# Altium PCB 256ch Adaptor PCB_TY.PcbDoc (part 1 of 2)
Units mm, origin at the board's own origin, x right, y up, seen from the top; angles counter-clockwise.
Board outline 152.4 x 101.6 mm, 4 copper layers (Top Layer, Signal Layer 1, Signal Layer 2, Bottom Layer), stack 0.778 mm thick; 1 components, 288 nets, 677 pads, 414 vias.
Unrouted connection lines stored in the file: 11.
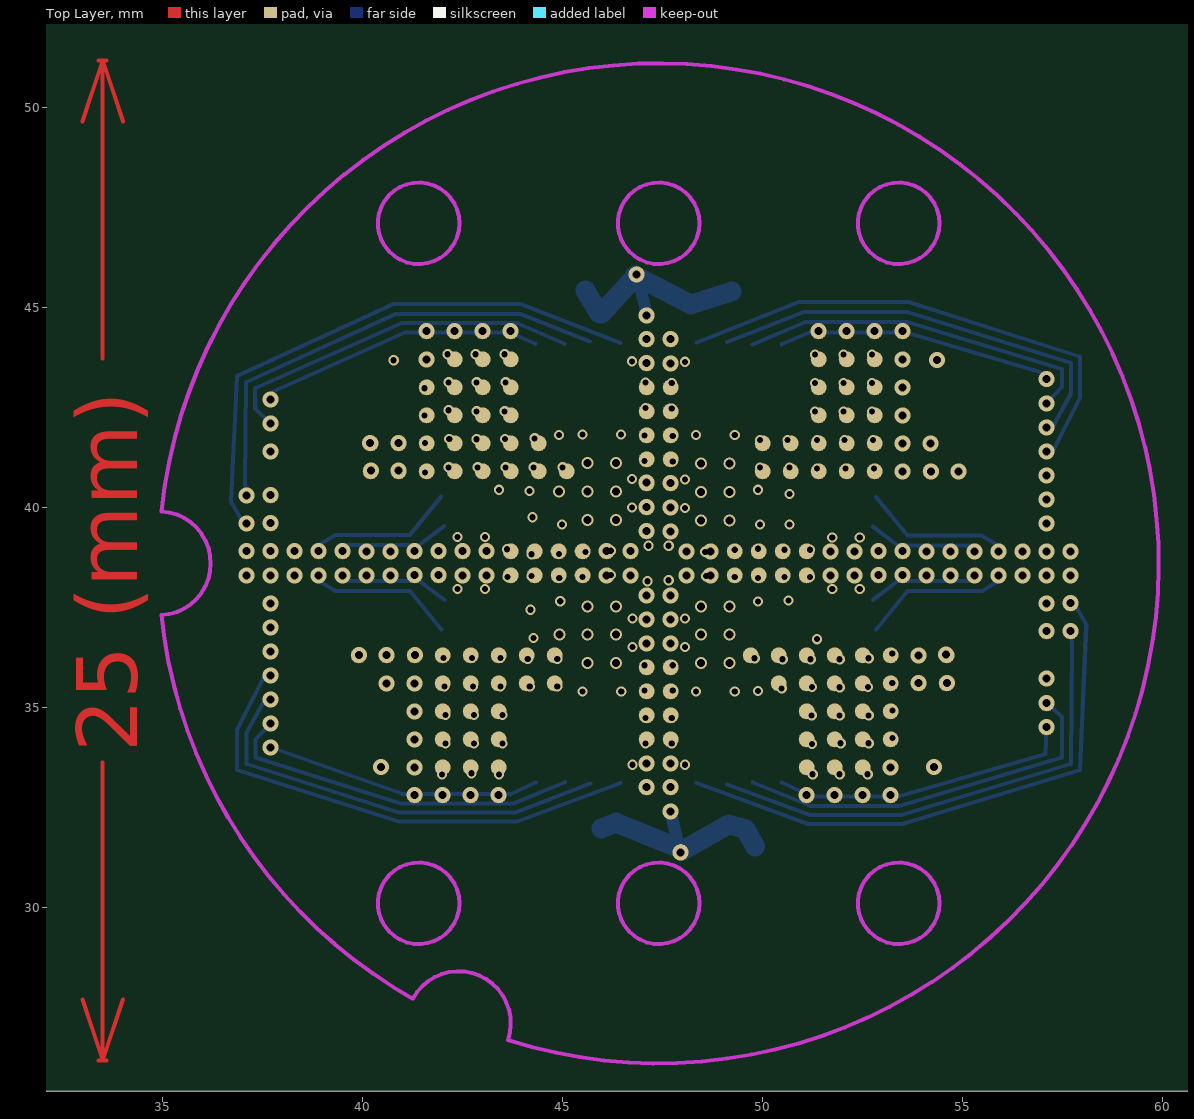
[diagram p0: Top Layer view]
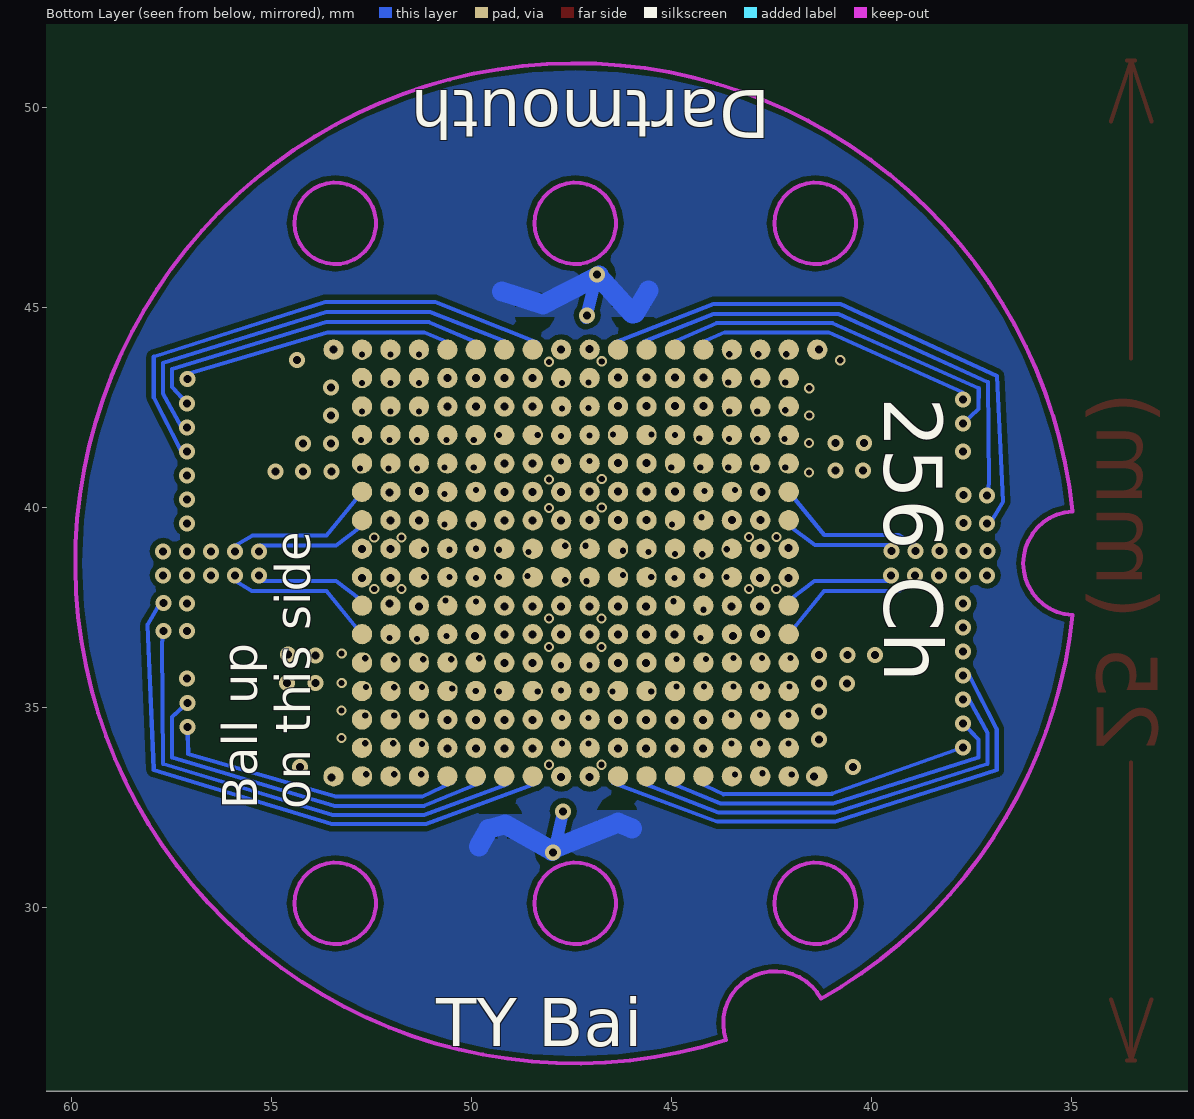
[diagram p1: Bottom Layer view, seen from below]
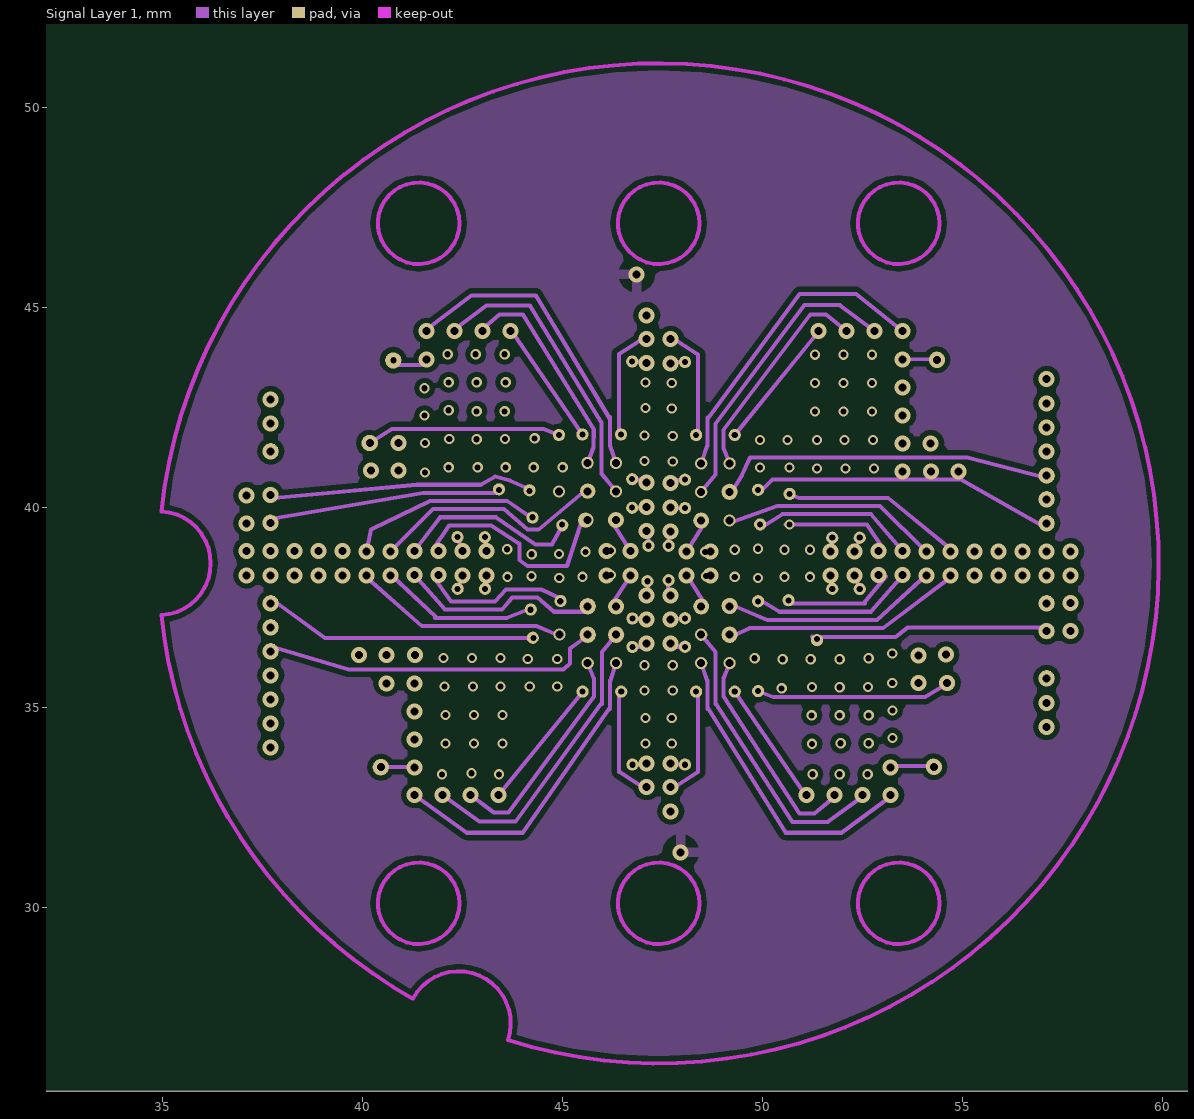
[diagram p2: Signal Layer 1]
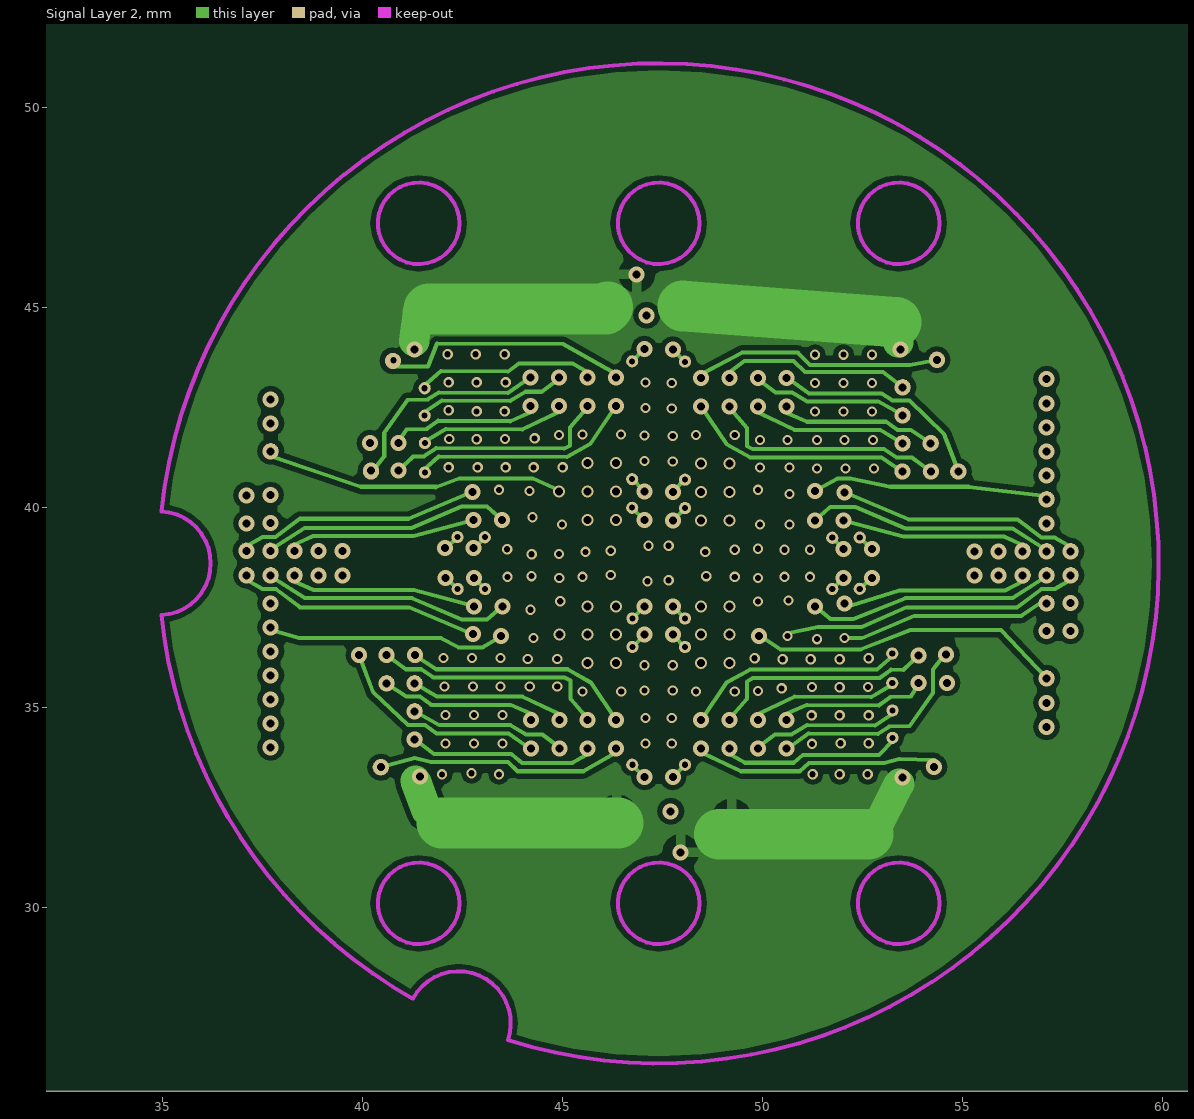
[diagram p3: Signal Layer 2]

## Layer stack, top to bottom
Top Solder: solder mask 0.0102, Solder Resist, Dk 3.5
Top Layer: signal copper 0.0356
Dielectric 1: core 0.254, FR-4, Dk 4.2
Signal Layer 1: signal copper 0.036
Dielectric 3: prepreg 0.127, Dk 4.2
Signal Layer 2: signal copper 0.036
Dielectric 5: core 0.254, Dk 4.2
Bottom Layer: signal copper 0.0356
Bottom Solder: solder mask 0.0102, Solder Resist, Dk 3.5

## Board outline
25.4,25.4 177.8,25.4 177.8,127 25.4,127

## Design rules (kind name [scope] priority, off if disabled: settings)
Clearance [All] p1: gap=0.127 ignorepadtopadclearanceinfootprint=FALSE
PolygonConnect [All] p1: connectstyle=Relief reliefconductorwidth=0.254 reliefentries=4 polygonreliefangle="90 Angle" airgapwidth=0.254
RoomDefinition Sheet1 [InComponentClass('Sheet1')] p1: confinementstyle=ConfineIn formatcopy=TRUE lockcomponents=FALSE outline 25.41,25.41 27.31,25.41 27.31,26.975 25.41,26.975
RoutingVias [All] p1: holewidth=0.711 width=1.27 viastyle="Through Hole" minholewidth=0.152 minwidth=0.254 maxholewidth=0.711 maxwidth=1.27
SolderMaskExpansion [All] p1: expansion=0.051 istentingtop=FALSE
Width [All] p1: maxlimit=0.254 minlimit=0.076 preferedwidth=0.254
30 further rules are at their usual default settings.

## Components (designator, comment, footprint, x,y, rotation, side; value= is the part's Value field where it differs from the comment)
? "Comment" Array16_16 52.73,43.942 r180 bottom

## Footprints (in the part's own frame and the unit in brackets; to place one, negate y for a bottom-side part, rotate by r counter-clockwise, add the part's x,y. Pads: shape width x height; smd on the part's side, far side on the other; paste and mask are expansions set on the pad)
Array16_16 [mil]
  round 20 smd: 0(0,0) 1(28,0) 2(56,0) 3(84,0) 4(112,0) 5(140,0) 6(168,0) 7(196,0) 8(224,0) 9(252,0) 10(280,0) 11(308,0) 12(336,0) 13(364,0) 14(392,0) 15(420,0) 16(0,-28) 17(28,-28) 18(56,-28) 19(84,-28) 20(112,-28) 21(140,-28) 22(168,-28) 23(196,-28) 24(224,-28) 25(252,-28) 26(280,-28) 27(308,-28) 28(336,-28) 29(364,-28) 30(392,-28) 31(420,-28) 32(0,-56) 33(28,-56) 34(56,-56) 35(84,-56) 36(112,-56) 37(140,-56) 38(168,-56) 39(196,-56) 40(224,-56) 41(252,-56) 42(280,-56) 43(308,-56) 44(336,-56) 45(364,-56) 46(392,-56) 47(420,-56) 48(0,-84) 49(28,-84) 50(56,-84) 51(84,-84) 52(112,-84) 53(140,-84) 54(168,-84) 55(196,-84) 56(224,-84) 57(252,-84) 58(280,-84) 59(308,-84) 60(336,-84) 61(364,-84) 62(392,-84) 63(420,-84) 64(0,-112) 65(28,-112) 66(56,-112) 67(84,-112) 68(112,-112) 69(140,-112) 70(168,-112) 71(196,-112) 72(224,-112) 73(252,-112) 74(280,-112) 75(308,-112) 76(336,-112) 77(364,-112) 78(392,-112) 79(420,-112) 80(0,-140) 81(28,-140) 82(56,-140) 83(84,-140) 84(112,-140) 85(140,-140) 86(168,-140) 87(196,-140) 88(224,-140) 89(252,-140) 90(280,-140) 91(308,-140) 92(336,-140) 93(364,-140) 94(392,-140) 95(420,-140) 96(0,-168) 97(28,-168) 98(56,-168) 99(84,-168) 100(112,-168) 101(140,-168) 102(168,-168) 103(196,-168) 104(224,-168) 105(252,-168) 106(280,-168) 107(308,-168) 108(336,-168) 109(364,-168) 110(392,-168) 111(420,-168) 112(0,-196) 113(28,-196) 114(56,-196) 115(84,-196) 116(112,-196) 117(140,-196) 118(168,-196) 119(196,-196) 120(224,-196) 121(252,-196) 122(280,-196) 123(308,-196) 124(336,-196) 125(364,-196) 126(392,-196) 127(420,-196) 128(0,-224) 129(28,-224) 130(56,-224) 131(84,-224) 132(112,-224) 133(140,-224) 134(168,-224) 135(196,-224) 136(224,-224) 137(252,-224) 138(280,-224) 139(308,-224) 140(336,-224) 141(364,-224) 142(392,-224) 143(420,-224) 144(0,-252) 145(28,-252) 146(56,-252) 147(84,-252) 148(112,-252) 149(140,-252) 150(168,-252) 151(196,-252) 152(224,-252) 153(252,-252) 154(280,-252) 155(308,-252) 156(336,-252) 157(364,-252) 158(392,-252) 159(420,-252) 160(0,-280) 161(28,-280) 162(56,-280) 163(84,-280) 164(112,-280) 165(140,-280) 166(168,-280) 167(196,-280) 168(224,-280) 169(252,-280) 170(280,-280) 171(308,-280) 172(336,-280) 173(364,-280) 174(392,-280) 175(420,-280) 176(0,-308) 177(28,-308) 178(56,-308) 179(84,-308) 180(112,-308) 181(140,-308) 182(168,-308) 183(196,-308) 184(224,-308) 185(252,-308) 186(280,-308) 187(308,-308) 188(336,-308) 189(364,-308) 190(392,-308) 191(420,-308) 192(0,-336) 193(28,-336) 194(56,-336) 195(84,-336) 196(112,-336) 197(140,-336) 198(168,-336) 199(196,-336) 200(224,-336) 201(252,-336) 202(280,-336) 203(308,-336) 204(336,-336) 205(364,-336) 206(392,-336) 207(420,-336) 208(0,-364) 209(28,-364) 210(56,-364) 211(84,-364) 212(112,-364) 213(140,-364) 214(168,-364) 215(196,-364) 216(224,-364) 217(252,-364) 218(280,-364) 219(308,-364) 220(336,-364) 221(364,-364) 222(392,-364) 223(420,-364) 224(0,-392) 225(28,-392) 226(56,-392) 227(84,-392) 228(112,-392) 229(140,-392) 230(168,-392) 231(196,-392) 232(224,-392) 233(252,-392) 234(280,-392) 235(308,-392) 236(336,-392) 237(364,-392) 238(392,-392) 239(420,-392) 240(0,-420) 241(28,-420) 242(56,-420) 243(84,-420) 244(112,-420) 245(140,-420) 246(168,-420) 247(196,-420) 248(224,-420) 249(252,-420) 250(280,-420) 251(308,-420) 252(336,-420) 253(364,-420) 254(392,-420) 255(420,-420)

## Free pads (board coordinates)
  round 0.406 on Mid2: 0(37.094,38.913) 0(37.1,38.3) 0(37.694,38.913) 0(37.7,41.4) 0(37.7,38.3) 0(38.294,38.913) 0(38.3,38.3) 0(39.911,36.306) 0(40.208,40.894) 0(40.452,33.5) 0(40.596,36.306) 0(40.6,35.6) 0(40.757,43.66) 0(41.3,34.197) 0(41.3,34.9) 0(41.3,35.6) 0(41.308,36.306) 0(53.492,40.894) 0(53.5,41.6) 0(53.5,42.3) 0(53.5,43) 0(53.9,35.608) 0(53.9,36.293) 0(54.204,40.894) 0(54.204,41.605) 0(54.356,43.688) 0(54.585,36.319) 0(54.889,40.894) 0(56.501,38.913) 0(56.501,38.297) 0(57.1,35.725) 0(57.1,38.9) 0(57.1,40.2) 0(57.1,37.6) 0(57.1,38.3) 0(57.7,38.9) 0(57.7,38.3)
  round 0.4 smd: 0(37.1,38.9) 0(37.1,39.6) 0(37.1,40.3) 0(37.1,38.3) 0(37.7,34) 0(37.7,34.6) 0(37.7,35.2) 0(37.7,35.8) 0(37.7,36.4) 0(37.7,37) 0(37.7,37.6) 0(37.7,38.9) 0(37.7,39.6) 0(37.7,40.3) 0(37.7,41.4) 0(37.7,42.1) 0(37.7,42.7) 0(37.7,38.3) 0(38.3,38.9) 0(38.3,38.3) 0(38.9,38.9) 0(38.9,38.3) 0(39.5,38.9) 0(39.5,38.3) 0(39.9,36.3) 0(40.1,38.9) 0(40.1,38.3) 0(40.2,40.9) 0(40.2,41.6) 0(40.6,35.6) 0(40.6,36.3) 0(40.7,38.9) 0(40.7,38.3) 0(40.9,40.9) 0(40.9,41.6) 0(41.3,38.9) 0(41.3,38.3) 0(41.3,32.8) 0(41.3,33.5) 0(41.3,34.2) 0(41.3,34.9) 0(41.3,35.6) 0(41.3,36.3) 0(41.6,40.9) 0(41.6,41.6) 0(41.6,42.3) 0(41.6,43) 0(41.6,43.7) 0(41.6,44.4) 0(41.9,38.9) 0(41.9,38.3) 0(42,32.8) 0(42,33.5) 0(42,34.2) 0(42,34.9) 0(42,35.6) 0(42,36.3) 0(42.3,40.9) 0(42.3,41.6) 0(42.3,42.3) 0(42.3,43) 0(42.3,43.7) 0(42.3,44.4) 0(42.5,38.9) 0(42.5,38.3) 0(42.7,32.8) 0(42.7,33.5) 0(42.7,34.2) 0(42.7,34.9) 0(42.7,35.6) 0(42.7,36.3) 0(43,40.9) 0(43,41.6) 0(43,42.3) 0(43,43) 0(43,43.7) 0(43,44.4) 0(43.1,38.9) 0(43.1,38.3) 0(43.4,32.8) 0(43.4,33.5) 0(43.4,34.2) 0(43.4,34.9) 0(43.4,35.6) 0(43.4,36.3) 0(43.7,38.9) 0(43.7,38.3) 0(43.7,40.9) 0(43.7,41.6) 0(43.7,42.3) 0(43.7,43) 0(43.7,43.7) 0(43.7,44.4) 0(44.1,35.6) 0(44.1,36.3) 0(44.3,38.9) 0(44.3,38.3) 0(44.4,40.9) 0(44.4,41.6) 0(44.8,35.6) 0(44.8,36.3) 0(44.9,38.9) 0(44.9,38.3) 0(45.1,40.9) 0(45.5,38.9) 0(45.5,38.3) 0(46.1,38.9) 0(46.1,38.3) 0(46.7,38.9) 0(46.7,38.3) 0(46.85,45.827) 0(47.1,39.4) 0(47.1,40) 0(47.1,40.6) 0(47.1,41.2) 0(47.1,41.8) 0(47.1,42.4) 0(47.1,43) 0(47.1,43.6) 0(47.1,44.2) 0(47.1,44.8) 0(47.1,33) 0(47.1,33.6) 0(47.1,34.2) 0(47.1,34.8) 0(47.1,35.4) 0(47.1,36) 0(47.1,36.6) 0(47.1,37.2) 0(47.1,37.8) 0(47.7,39.4) 0(47.7,43.6) 0(47.7,40) 0(47.7,40.6) 0(47.7,41.2) 0(47.7,41.8) 0(47.7,42.4) 0(47.7,43) 0(47.7,44.2) 0(47.7,32.4) 0(47.7,33) 0(47.7,33.6) 0(47.7,34.2) 0(47.7,34.8) 0(47.7,35.4) 0(47.7,36) 0(47.7,36.6) 0(47.7,37.2) 0(47.7,37.8) 0(47.951,31.378) 0(48.1,38.9) 0(48.1,38.3) 0(48.7,38.9) 0(48.7,38.3) 0(49.3,38.9) 0(49.3,38.3) 0(49.7,36.3) 0(49.9,38.9) 0(49.9,38.3) 0(50,40.9) 0(50,41.6) 0(50.4,35.6) 0(50.4,36.3) 0(50.5,38.9) 0(50.5,38.3) 0(50.7,40.9) 0(50.7,41.6) 0(51.1,38.9) 0(51.1,32.8) 0(51.1,33.5) 0(51.1,34.2) 0(51.1,34.9) 0(51.1,35.6) 0(51.1,36.3) 0(51.1,38.3) 0(51.4,40.9) 0(51.4,41.6) 0(51.4,42.3) 0(51.4,43) 0(51.4,43.7) 0(51.4,44.4) 0(51.7,38.9) 0(51.7,38.3) 0(51.8,32.8) 0(51.8,33.5) 0(51.8,34.2) 0(51.8,34.9) 0(51.8,35.6) 0(51.8,36.3) 0(52.1,40.9) 0(52.1,41.6) 0(52.1,42.3) 0(52.1,43) 0(52.1,43.7) 0(52.1,44.4) 0(52.3,38.9) 0(52.3,38.3) 0(52.5,32.8) 0(52.5,33.5) 0(52.5,34.2) 0(52.5,34.9) 0(52.5,35.6) 0(52.5,36.3) 0(52.8,40.9) 0(52.8,41.6) 0(52.8,42.3) 0(52.8,43) 0(52.8,43.7) 0(52.8,44.4) 0(52.9,38.9) 0(52.9,38.3) 0(53.2,32.8) 0(53.2,33.5) 0(53.2,34.2) 0(53.2,34.9) 0(53.2,35.6) 0(53.2,36.3) 0(53.5,38.9) 0(53.5,40.9) 0(53.5,41.6) 0(53.5,42.3) 0(53.5,43) 0(53.5,44.4) 0(53.5,43.7) 0(53.5,38.3) 0(53.9,35.6) 0(53.9,36.3) 0(54.1,38.9) 0(54.1,38.3) 0(54.2,40.9) 0(54.2,41.6) 0(54.6,35.6) 0(54.6,36.3) 0(54.7,38.9) 0(54.7,38.3) 0(54.9,40.9) 0(55.3,38.9) 0(55.3,38.3) 0(55.9,38.9) 0(55.9,38.3) 0(56.5,38.9) 0(56.5,38.3) 0(57.099,43.205) 0(57.1,38.9) 0(57.1,34.5) 0(57.1,35.1) 0(57.1,35.725) 0(57.1,36.9) 0(57.1,37.6) 0(57.1,39.6) 0(57.1,40.2) 0(57.1,40.8) 0(57.1,41.4) 0(57.1,42) 0(57.1,42.6) 0(57.1,38.3) 0(57.7,38.9) 0(57.7,36.9) 0(57.7,37.6) 0(57.7,38.3)
  round 0.406 on Mid1: 0(37.694,39.613) 0(37.694,40.31) 0(37.7,41.4) 0(37.7,36.4) 0(37.7,37) 0(37.7,37.6) 0(40.17,41.606) 0(40.452,33.5) 0(40.765,43.672) 0(45.626,36.814) 0(45.626,37.525) 0(46.337,36.814) 0(49.174,40.386) 0(49.174,36.814) 0(49.174,37.535) 0(54.356,43.688) 0(54.611,35.608) 0(57.1,35.725) 0(57.1,39.6) 0(57.1,40.2) 0(57.1,36.903) 0(57.1,37.6) 0(57.101,40.792)
  round 0.305 on Mid2: 0(40.894,40.919) 0(40.894,41.605) 0(41.549,42.291) 0(41.549,42.977) 0(41.554,40.869) 0(41.554,41.605) 0(42.368,39.256) 0(42.374,37.957) 0(43.054,39.251) 0(43.06,37.957) 0(46.737,39.987) 0(46.737,40.704) 0(46.737,43.65) 0(46.738,33.563) 0(46.743,36.509) 0(46.743,37.22) 0(48.057,36.507) 0(48.057,39.98) 0(48.057,40.691) 0(48.057,43.642) 0(48.057,33.563) 0(48.057,37.22) 0(51.74,39.238) 0(51.74,37.957) 0(52.426,39.243) 0(52.426,37.962) 0(53.239,35.608) 0(53.239,36.344) 0(53.244,34.236) 0(53.244,34.922)
  round 0.508 smd far side: 0(41.351,33.274) 0(41.351,43.942) 0(53.442,33.274) 0(53.442,43.942)
  round 0.305 on Mid1: 0(42.368,39.256) 0(42.374,37.962) 0(43.054,39.251) 0(43.06,37.962) 0(43.409,40.45) 0(44.171,40.424) 0(44.203,37.444) 0(44.246,39.743) 0(44.254,36.738) 0(44.907,41.808) 0(44.947,37.657) 0(44.991,39.552) 0(45.492,41.821) 0(45.499,35.392) 0(45.619,41.11) 0(45.626,36.103) 0(46.33,40.399) 0(46.33,41.11) 0(46.337,36.103) 0(46.457,41.821) 0(46.464,35.392) 0(46.737,39.987) 0(46.737,40.704) 0(46.737,43.645) 0(46.743,33.568) 0(46.743,36.509) 0(46.743,37.22) 0(47.117,38.151) 0(47.142,39.04) 0(47.65,38.176) 0(47.65,39.04) 0(48.057,39.98) 0(48.057,40.691) 0(48.057,43.632) 0(48.057,33.568) 0(48.057,36.514) 0(48.057,37.225) 0(48.336,41.808) 0(48.336,35.392) 0(48.463,40.386) 0(48.463,41.097) 0(48.463,36.103) 0(48.463,36.814) 0(49.174,41.097) 0(49.174,36.103) 0(49.301,41.808) 0(49.301,35.392) 0(49.886,40.437) 0(49.886,37.652) 0(49.886,35.404) 0(49.936,39.573) 0(50.648,37.678) 0(50.673,40.335) 0(51.359,36.678) 0(51.74,39.238) 0(51.74,37.962) 0(52.426,39.238) 0(52.426,37.957)
  round 0.381 on Mid1: 0(45.575,39.679) 0(45.626,40.403) 0(45.633,37.53) 0(54.266,33.525)
  round 0.4 on Mid1: 0(46.33,39.683) 0(46.337,37.52) 0(48.463,39.67) 0(48.463,37.52)
  round 0.381 on Mid2: 0(54.266,33.525)

## Via types
v1: diameter 0.254, hole 0.152, Top Layer to Bottom Layer, 167 vias
v2: diameter 0.4, hole 0.2, Top Layer to Bottom Layer, 77 vias
v3: diameter 0.4, hole 0.2, Top Layer to Signal Layer 1, 72 vias
v4: diameter 0.4, hole 0.2, Signal Layer 2 to Bottom Layer, 70 vias
v5: diameter 0.3, hole 0.2, Top Layer to Bottom Layer, 26 vias
v6: diameter 0.254, hole 0.152, Signal Layer 2 to Bottom Layer, 2 vias

## Nets (pads, with @x,y where several pads share a name; then routed paths per layer and width w, separated by ;. In a path a pad name is that pad's centre, name@x,y a point inside that pad or via, vN(x,y) a via of type N, cw(c..) or ccw(c..) an arc to the next point about the centre after c; other vN are vias at no path point)
CS3+: 
CS3-: 
CS+: 
CS-: 
ELEC_TEST1: 
ELEC_TEST2: 
ELEC_TEST3: 
ELEC_TEST4: 
GND: pad.0@46.85,45.827 pad.0@47.1,44.8 pad.0@47.7,32.4 pad.0@47.951,31.378 | length 29.5
  Signal Layer 2 w0.762: 41.285,44.147 41.382,44.876 ; 52.831,31.955 53.411,33.089 ; 53.309,44.646 v4@53.391,44.12
  Signal Layer 2 w1.27: 41.656,44.958 46.076,44.958 46.126,45.009 ; 41.986,32.106 46.38,32.106 ; 48.006,45.034 53.34,44.628 ; 48.922,31.825 52.63,31.825
  Bottom Layer w0.5: 45.568,45.415 45.905,44.856 45.966,44.841 v2@46.821,45.781 ; 45.975,31.97 46.33,32.119 v2@47.904,31.471 ; v2@46.811,45.79 48.208,45.066 49.225,45.39 ; v2@47.985,31.411 49.158,32.071 49.564,31.958 49.809,31.521
  other v2: 47.95,31.375 46.85,45.825
  other v4: 53.442,43.942
IN0: pad.0@43.7,44.4
  other v3: 43.7,44.405
IN1: pad.0@46.457,41.821 pad.0@47.1,44.2 | length 2.8
  Signal Layer 1 w0.102: pad.0@46.407,41.821 46.407,43.828 v3@47.098,44.278
  other v1: 46.457,41.821
  other v3: 47.1,44.205
IN2: pad.0@43,44.4 pad.0@45.619,41.11 | length 5.5
  Signal Layer 1 w0.102: v3@42.948,44.413 43.425,44.825 44,44.825 45.772,41.948 ; v5(45.619,41.11) 45.772,41.491 45.776,41.947
  other v3: 43,44.405
IN3: pad.0@46.737,43.65 pad.0@46.737,43.645 pad.0@47.1,43.6 | length 0.8
  Signal Layer 1 w0.102: pad.0@46.737,43.645 v3@47.092,43.645
  Signal Layer 2 w0.102: pad.0@46.732,43.65 v4@47.037,43.955
  other v1: 46.737,43.65
  other v3: 47.092,43.612
  other v4: 47.042,43.955
IN4: pad.0@43.7,43.7 pad.0@45.492,41.821 | length 3.2
  Signal Layer 1 w0.102: 43.701,44.438 v1(45.492,41.821)
  other v1: 43.55,43.825
IN5: pad.0@47.1,43
  other v1: 47.067,43.117
IN6: pad.0@43,43.7
  other v1: 42.825,43.825
IN7: pad.0@47.1,42.4
  other v1: 47.067,42.482
IN8: pad.0@43.7,43
  other v1: 43.575,43.125
IN9: pad.0@47.1,41.8
  other v1: 47.042,41.796
IN10: pad.0@43,43
  other v1: 42.85,43.125
IN11: pad.0@47.1,41.2
  other v1: 47.042,41.161
IN12: pad.0@43.7,42.3
  other v1: 43.55,42.4
IN13: pad.0@46.737,40.704 pad.0@47.1,40.6 | length 0.8
  Signal Layer 1 w0.102: pad.0@46.737,40.699 v3@47.092,40.699
  Signal Layer 2 w0.102: pad.0@46.711,40.749 v4@47.042,40.394
  other v1: 46.737,40.704
  other v3: 47.092,40.615
  other v4: 47.042,40.399
IN14: pad.0@43,42.3
  other v1: 42.85,42.4
IN15: pad.0@46.737,39.987 pad.0@47.1,40 | length 0.8
  Signal Layer 1 w0.102: pad.0@46.737,39.987 v3(47.092,40.013)
  Signal Layer 2 w0.102: pad.0@46.737,39.987 v4@47.042,39.683
  other v1: 46.737,39.992
  other v4: 47.042,39.688
IN16: pad.0@47.1,39.4 pad.0@47.142,39.04 | length 0.3
  Signal Layer 1 w0.102: v1(47.142,39.04) v3@47.143,39.322
  other v3: 47.092,39.413
IN17: pad.0@45.1,40.9
  other v1: 45,41
IN18: pad.0@46.7,38.9 pad.0@46.33,39.683 | length 0.9
  Signal Layer 1 w0.102: pad.0@46.189,39.696 v3(46.694,38.913)
  other v5: 46.33,39.688
IN19: pad.0@44.4,41.6
  other v1: 44.3,41.725
IN20: pad.0@46.1,38.9
  other v1: 46.203,38.913
  other v3: 46.094,38.913
IN21: pad.0@44.4,40.9
  other v1: 44.275,41
IN22: pad.0@45.5,38.9
  other v1: 45.568,38.887
IN23: pad.0@43.7,40.9
  other v1: 43.575,41
IN24: pad.0@44.9,38.9
  other v1: 44.907,38.837
IN25: pad.0@43.7,41.6
  other v1: 43.561,41.707
IN26: pad.0@44.3,38.9
  other v1: 44.225,38.825
IN27: pad.0@43,40.9
  other v1: 42.875,41
IN28: pad.0@43.7,38.9
  other v1: 43.613,38.951
IN29: pad.0@43,41.6
  other v1: 42.85,41.7
IN30: pad.0@43.1,38.9 pad.0@43.054,39.251 | length 0.7
  Signal Layer 1 w0.102: pad.0@43.054,39.251 v3@43.094,38.908
  Signal Layer 2 w0.102: v4@42.774,38.971 pad.0@43.054,39.251
  other v1: 43.054,39.256
  other v3: 43.094,38.913
  other v4: 42.774,38.976
IN31: pad.0@42.3,40.9
  other v1: 42.15,41
IN32: pad.0@42.5,38.9 pad.0@42.368,39.256 | length 0.8
  Signal Layer 1 w0.102: pad.0@42.368,39.251 v3@42.494,38.908
  Signal Layer 2 w0.102: v4@42.063,38.971 pad.0@42.368,39.251
  other v1: 42.368,39.256
  other v3: 42.494,38.913
  other v4: 42.063,38.976
IN33: pad.0@41.9,38.9 pad.0@45.575,39.679 | length 5.5
  Signal Layer 1 w0.102: v3@41.75,38.938 42.164,39.548 43.205,39.548 43.917,39.091 43.917,38.684 44.12,38.532 45.11,38.532 pad.0@45.492,39.713
  other v3: 41.9,38.905
  other v5: 45.619,39.688
IN34: pad.0@42.3,41.6
  other v1: 42.164,41.707
IN35: pad.0@41.3,38.9 pad.0@44.991,39.552 | length 4.6
  Signal Layer 1 w0.102: v3@41.294,38.913 41.935,39.751 43.332,39.751 44.323,39.065 44.729,39.065 pad.0@45.009,39.573
  other v1: 44.983,39.573
  other v3: 41.3,38.905
IN36: pad.0@41.6,40.9 pad.0@41.554,40.869 | length 5.5
  Signal Layer 2 w0.102: pad.0@41.504,40.919 41.91,41.275 45.111,41.262 45.695,41.593 v4(46.33,42.532)
  other v1: 41.554,40.869
IN37: pad.0@40.7,38.9 pad.0@45.626,40.403 | length 5.7
  Signal Layer 1 w0.102: v3@40.709,38.913 41.758,39.954 43.536,39.954 44.12,39.446 44.399,39.446 pad.0@45.491,40.361
  other v3: 40.7,38.9
  other v5: 45.619,40.399
IN38: pad.0@41.6,41.6
  other v1: 41.554,41.605
IN39: pad.0@40.1,38.9 pad.0@44.246,39.743 | length 4.8
  Signal Layer 1 w0.102: v3@40.095,38.888 40.208,39.446 41.681,40.157 43.612,40.157 pad.0@44.196,39.751
  other v1: 44.247,39.751
  other v3: 40.1,38.9
IN40: pad.0@40.9,40.9
IN41: pad.0@39.5,38.9 | length 2.7
  Bottom Layer w0.102: v2@39.498,39.053 41.403,39.053 42.034,39.528
  other v2: 39.494,38.913
IN42: pad.0@40.9,41.6 pad.0@41.554,41.605 | length 3.7
  Signal Layer 2 w0.102: pad.0@41.529,41.631 42.088,41.961 43.994,41.948 v4@45.01,42.431
  other v4: 44.908,42.532
IN43: pad.0@38.9,38.9 | length 3.6
  Bottom Layer w0.102: v2@38.888,39.053 39.32,39.307 41.174,39.307 41.962,40.272
  other v2: 38.894,38.913
IN44: pad.0@40.2,40.9 pad.0@40.208,40.894 pad.0@40.894,40.919 | length 11
  Signal Layer 2 w0.102: pad.0@40.255,40.907 40.538,41.275 40.538,41.859 41.123,42.685 41.631,42.697 41.91,42.875 43.638,42.863 v4@44.171,43.244 ; v2(40.894,40.919) 41.275,41.275 41.529,41.275 41.834,41.478 45.035,41.466 45.187,41.542 45.187,41.999 v4@45.645,42.532
  other v2: 40.208,40.919
  other v4: 45.619,42.532 44.197,43.244
IN45: pad.0@38.3,38.9 pad.0@38.294,38.913 | length 4.6
  Signal Layer 2 w0.102: pad.0@38.289,39.065 38.761,39.281 41.276,39.281 v4@42.774,39.683
  other v2: 38.294,38.913
  other v4: 42.774,39.688
IN46: pad.0@40.2,41.6 pad.0@40.17,41.606 pad.0@40.894,41.605 pad.0@44.907,41.808 | length 8.6
  Signal Layer 1 w0.102: pad.0@40.17,41.606 40.742,41.961 44.526,41.961 pad.0@44.894,41.809
  Signal Layer 2 w0.102: pad.0@40.865,41.585 41.098,41.948 41.605,41.961 41.885,42.164 43.689,42.151 v4@44.273,42.405
  other v2: 40.183,41.605 40.894,41.605
  other v4: 44.197,42.532
IN47: pad.0@37.7,38.9 pad.0@37.694,38.913 | length 6.1
  Signal Layer 2 w0.102: pad.0@37.773,38.989 38.558,39.484 41.225,39.484 42.47,40.018 43.105,40.018 v4(43.486,39.688)
  other v2: 37.694,38.913
IN48: pad.0@37.1,38.9 pad.0@37.094,38.913 | length 6
  Signal Layer 2 w0.102: pad.0@37.09,39.027 37.491,39.256 37.821,39.256 38.431,39.713 41.149,39.713 v4@42.774,40.399
  other v2: 37.094,38.913
  other v4: 42.749,40.38
IN49: pad.0@42.3,42.3
  other v1: 42.15,42.425
IN50: pad.0@37.7,39.6 pad.0@37.694,39.613 | length 5.8
  Signal Layer 1 w0.102: pad.0@37.695,39.707 41.504,40.361 43.409,40.361
  other v2: 37.694,39.613
IN51: pad.0@41.6,42.3 pad.0@41.549,42.291 | length 3.7
  Signal Layer 2 w0.102: pad.0@41.466,42.325 41.986,42.672 43.689,42.659 44.07,42.888 44.476,42.888 v4@44.926,43.222
  other v1: 41.549,42.291
  other v4: 44.908,43.244
IN52: pad.0@37.1,39.6
IN53: pad.0@42.3,43
  other v1: 42.15,43.125
IN54: pad.0@37.7,40.3 pad.0@37.694,40.31 pad.0@44.171,40.424 | length 6.5
  Signal Layer 1 w0.102: pad.0@37.789,40.236 41.351,40.564 42.951,40.564 43.307,40.767 43.688,40.665 pad.0@44.145,40.462
  other v1: 44.171,40.411
  other v2: 37.694,40.31
IN55: pad.0@41.6,43 pad.0@41.549,42.977 | length 4.4
  Signal Layer 2 w0.102: pad.0@41.521,43.025 41.961,43.409 43.638,43.396 43.917,43.599 45.238,43.599 v4@45.688,43.343
  other v1: 41.549,42.977
  other v4: 45.619,43.244
IN56: pad.0@37.1,40.3
IN57: pad.0@42.3,43.7
  other v1: 42.125,43.825
IN58: pad.0@37.7,41.4 | length 21.5
  Signal Layer 2 w0.102: pad.0@37.69,41.281 39.954,40.513 41.834,40.513 ; 41.825,40.5 42.425,40.725 44.25,40.725 v5@44.908,40.424
  Bottom Layer w0.102: v2@37.059,39.535 36.704,40.145 36.855,43.282 40.767,45.085 43.942,45.085 46.444,44.105
  other v2: 37.1,39.6
  other v5: 44.908,40.399
IN59: pad.0@40.757,43.66 pad.0@40.765,43.672 pad.0@41.6,43.7 | length 6.9
  Signal Layer 1 w0.102: pad.0@40.767,43.561 v3@41.58,43.561
  Signal Layer 2 w0.102: pad.0@40.768,43.523 41.636,43.524 41.859,44.094 45.01,44.082 v4@46.297,43.357
  other v1: 40.775,43.675
  other v3: 41.6,43.7
  other v4: 46.33,43.244
IN60: pad.0@37.7,42.1 | length 11.9
  Bottom Layer w0.102: v2(37.1,40.3) 37.11,40.297 37.059,40.602 37.084,43.129 40.818,44.831 43.942,44.831 45.682,44.146
IN61: pad.0@42.3,44.4 pad.0@46.33,40.399 | length 7.4
  Signal Layer 1 w0.102: v3@42.248,44.413 43.1,45.05 44.175,45.05 45.975,42.101 ; 45.975,42.126 45.975,40.831 v5(46.33,40.399)
  other v3: 42.3,44.405
IN62: pad.0@37.7,42.7 | length 9.2
  Bottom Layer w0.102: v2(37.7,42.1) 37.313,42.456 37.313,42.977 40.97,44.602 43.866,44.602 45.047,44.086
IN63: pad.0@41.6,44.4 pad.0@46.33,41.11 | length 7.8
  Signal Layer 1 w0.102: v3@41.548,44.413 42.724,45.299 44.325,45.3 46.17,42.228 ; 46.178,41.542 46.178,42.253 ; 46.186,41.541 v5(46.33,41.11)
  other v3: 41.6,44.405
IN64: pad.0@53.5,44.4 | length 6.8
  Signal Layer 1 w0.102: 48.623,42.216 50.927,45.337 52.324,45.337 v3@53.5,44.4
  other v3: 53.5,44.405
IN65: pad.0@57.099,43.205 | length 7
  Bottom Layer w0.102: 50.471,44.076 51.181,44.374 53.594,44.374 57.099,43.332 v2(57.099,43.205)
IN66: pad.0@52.8,44.4 | length 5.7
  Signal Layer 1 w0.102: 48.819,42.088 51.042,45.053 51.931,45.053 v3@52.8,44.4
  other v3: 52.8,44.405
IN67: pad.0@57.1,42.6 | length 9
  Bottom Layer w0.102: 49.747,44.073 51.054,44.628 53.619,44.628 57.48,43.459 57.48,43.002 v2(57.1,42.6)
IN68: pad.0@53.5,43.7 pad.0@54.356,43.688 | length 6.9
  Signal Layer 1 w0.102: v3(53.5,43.7) pad.0@54.282,43.703
  Signal Layer 2 w0.102: 48.496,43.344 49.479,43.866 50.876,43.866 51.181,43.561 53.68,43.561 v2(54.356,43.688)
IN69: pad.0@57.1,42 | length 10.8
  Bottom Layer w0.102: 49.112,44.134 51.029,44.882 53.619,44.882 57.709,43.612 57.709,42.85 57.252,42.012 v2(57.1,42)
IN70: pad.0@52.8,43.7
  other v1: 52.73,43.815
IN71: pad.0@57.1,41.4 | length 12.7
  Bottom Layer w0.102: 48.35,44.118 50.902,45.136 53.645,45.136 57.937,43.764 57.937,42.748 57.252,41.402 v2(57.1,41.4)
IN72: pad.0@53.5,43 | length 4.8
  Signal Layer 2 w0.102: 49.106,43.33 49.555,43.663 50.775,43.663 51.054,43.383 53.01,43.383 v2(53.5,43)
IN73: pad.0@49.174,40.386 pad.0@57.1,40.8 pad.0@57.101,40.792 | length 8.4
  Signal Layer 1 w0.102: pad.0@49.225,40.386 49.479,40.792 49.682,41.25 55.118,41.25 pad.0@57.048,40.744
  other v2: 57.1,40.8
IN74: pad.0@52.8,43
  other v1: 52.73,43.104
IN75: pad.0@57.1,40.2 | length 5.8
  Signal Layer 2 w0.102: v4@51.41,40.462 51.867,40.716 52.197,40.716 53.213,40.513 55.143,40.513 pad.0@57.074,40.284
  other v2: 57.1,40.2
  other v4: 51.308,40.411
IN76: pad.0@53.5,42.3 | length 3.9
  Signal Layer 2 w0.102: 49.868,43.209 50.317,42.875 50.724,42.875 51.105,42.647 52.883,42.647 pad.0@53.505,42.3
  other v2: 53.5,42.3
IN77: pad.0@57.1,39.6
  other v2: 57.1,39.6
IN78: pad.0@52.8,42.3
  other v1: 52.73,42.393
IN79: pad.0@57.7,38.9
  other v2: 57.7,38.9
IN80: pad.0@57.1,38.9
  other v2: 57.1,38.9
IN81: pad.0@54.9,40.9 pad.0@54.889,40.894 | length 5.4
  Signal Layer 2 w0.102: 50.622,43.231 51.156,42.85 52.959,42.85 53.238,42.672 53.67,42.672 54.534,41.834 pad.0@54.894,40.894
  other v2: 54.889,40.894
IN82: pad.0@56.5,38.9 pad.0@56.501,38.913
  other v2: 56.5,38.9
IN83: pad.0@54.2,41.6 pad.0@54.204,41.605 | length 3.9
  Signal Layer 2 w0.102: 50.521,42.393 51.105,42.139 53.086,42.139 53.365,41.935 53.696,41.935 pad.0@54.204,41.605
  other v2: 54.2,41.6
IN84: pad.0@55.9,38.9 | length 3.6
  Bottom Layer w0.102: 52.832,40.259 53.619,39.294 55.474,39.294 v2@55.905,39.04
  other v2: 55.9,38.9
IN85: pad.0@54.2,40.9 pad.0@54.204,40.894 | length 6
  Signal Layer 2 w0.102: 49.149,42.52 49.606,41.986 49.606,41.529 49.759,41.453 53.035,41.453 53.34,41.25 53.721,41.25 v2(54.204,40.894)
IN86: pad.0@55.3,38.9
  other v2: 55.3,38.9
IN87: pad.0@53.5,40.9 pad.0@53.492,40.894 | length 5.7
  Signal Layer 2 w0.102: 48.463,42.52 49.098,41.58 49.682,41.25 52.959,41.25 v2(53.492,40.894)
IN88: pad.0@50.673,40.335 pad.0@54.7,38.9 | length 4.6
  Signal Layer 1 w0.102: pad.0@50.673,40.335 50.902,40.234 53.137,40.234 v3@54.782,38.887
  other v3: 54.7,38.9
IN89: pad.0@53.5,41.6 | length 3.9
  Signal Layer 2 w0.102: 49.784,42.418 50.8,41.935 52.934,41.935 pad.0@53.492,41.605
  other v2: 53.5,41.6
IN90: pad.0@54.1,38.9 | length 5.3
  Signal Layer 1 w0.102: 49.276,39.649 50.368,40.03 52.934,40.03 v3@54.084,38.9
  other v3: 54.1,38.9
IN91: pad.0@52.8,40.9
  other v1: 52.781,40.97
IN92: pad.0@53.5,38.9 | length 4.1
  Signal Layer 1 w0.102: 49.936,39.472 50.495,39.827 52.705,39.827 v3@53.5,38.9
  other v3: 53.5,38.905
IN93: pad.0@52.8,41.6
  other v1: 52.756,41.681
IN94: pad.0@52.9,38.9 | length 2.8
  Signal Layer 1 w0.102: 50.571,39.573 52.603,39.573 v3@53.043,38.926
  other v3: 52.9,38.905
IN95: pad.0@52.1,40.9
  other v1: 52.07,40.97
IN96: pad.0@52.3,38.9 pad.0@52.426,39.238 pad.0@52.426,39.243 | length 0.8
  Signal Layer 1 w0.102: v3@52.3,38.895 pad.0@52.426,39.238
  Signal Layer 2 w0.102: pad.0@52.426,39.238 52.73,38.959
  other v1: 52.426,39.243
  other v3: 52.3,38.9
IN97: pad.0@51.7,38.9 pad.0@51.74,39.238 | length 0.7
  Signal Layer 1 w0.102: v3@51.7,38.895 pad.0@51.74,39.238
  Signal Layer 2 w0.102: pad.0@51.74,39.238 52.019,38.959
  other v1: 51.74,39.243
  other v3: 51.7,38.9
IN98: pad.0@52.1,41.6
  other v1: 52.045,41.681
IN99: pad.0@51.1,38.9
  other v1: 51.181,38.938
IN100: pad.0@51.4,40.9
  other v1: 51.359,40.97
IN101: pad.0@50.5,38.9
  other v1: 50.546,38.938
IN102: pad.0@51.4,41.6
  other v1: 51.359,41.681
IN103: pad.0@49.9,38.9
  other v1: 49.886,38.964
IN104: pad.0@50.7,40.9
  other v1: 50.673,40.996
IN105: pad.0@49.3,38.9
  other v1: 49.301,38.938
IN106: pad.0@50.7,41.6
  other v1: 50.622,41.681
IN107: pad.0@48.7,38.9
  other v1: 48.565,38.887
  other v3: 48.7,38.9
IN108: pad.0@50,40.9
  other v1: 49.936,40.996
IN109: pad.0@48.1,38.9 | length 0.9
  Signal Layer 1 w0.102: v3(48.1,38.9) 48.605,39.683
IN110: pad.0@50,41.6
  other v1: 49.936,41.681
IN111: pad.0@47.7,39.4 pad.0@47.65,39.04 | length 0.3
  Signal Layer 1 w0.102: v1(47.65,39.04) v3@47.65,39.309
  other v3: 47.701,39.4
IN112: pad.0@47.7,40 pad.0@48.057,39.98 | length 0.8
  Signal Layer 1 w0.102: v3(47.701,40) pad.0@48.057,39.975
  Signal Layer 2 w0.102: 47.752,39.67 pad.0@48.057,39.975
  other v1: 48.057,39.98
IN113: pad.0@52.1,42.3
  other v1: 52.019,42.393